# Altium PCB 不带继电器产品.PcbDoc
Units mil, origin at the board's own origin, x right, y up, seen from the top; angles counter-clockwise.
Board outline 2550 x 2362.2 mil, 2 copper layers (Top Layer, Bottom Layer); 139 components, 180 nets, 548 pads, 105 vias.
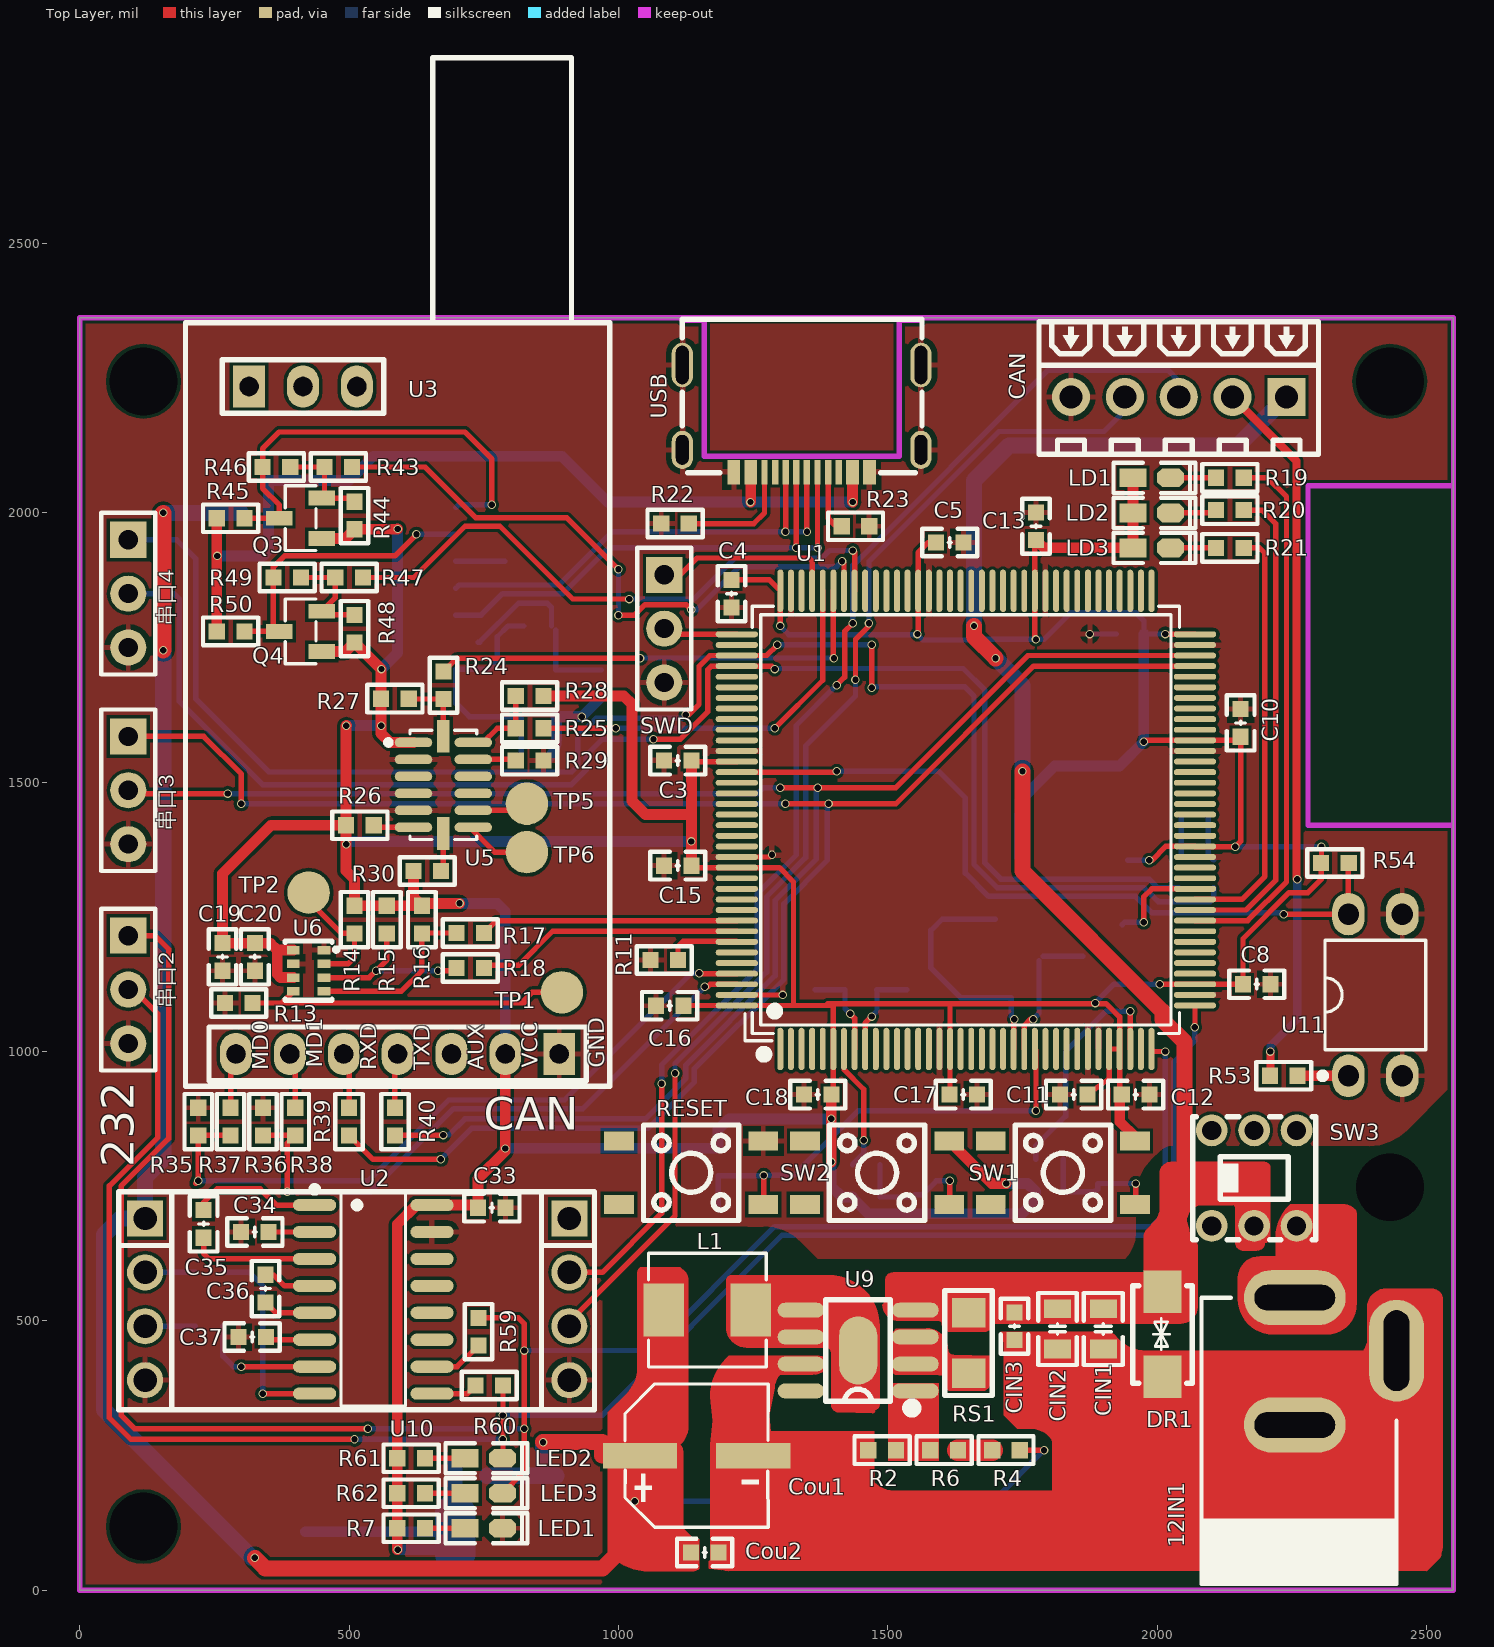
[diagram p0: Top Layer view]
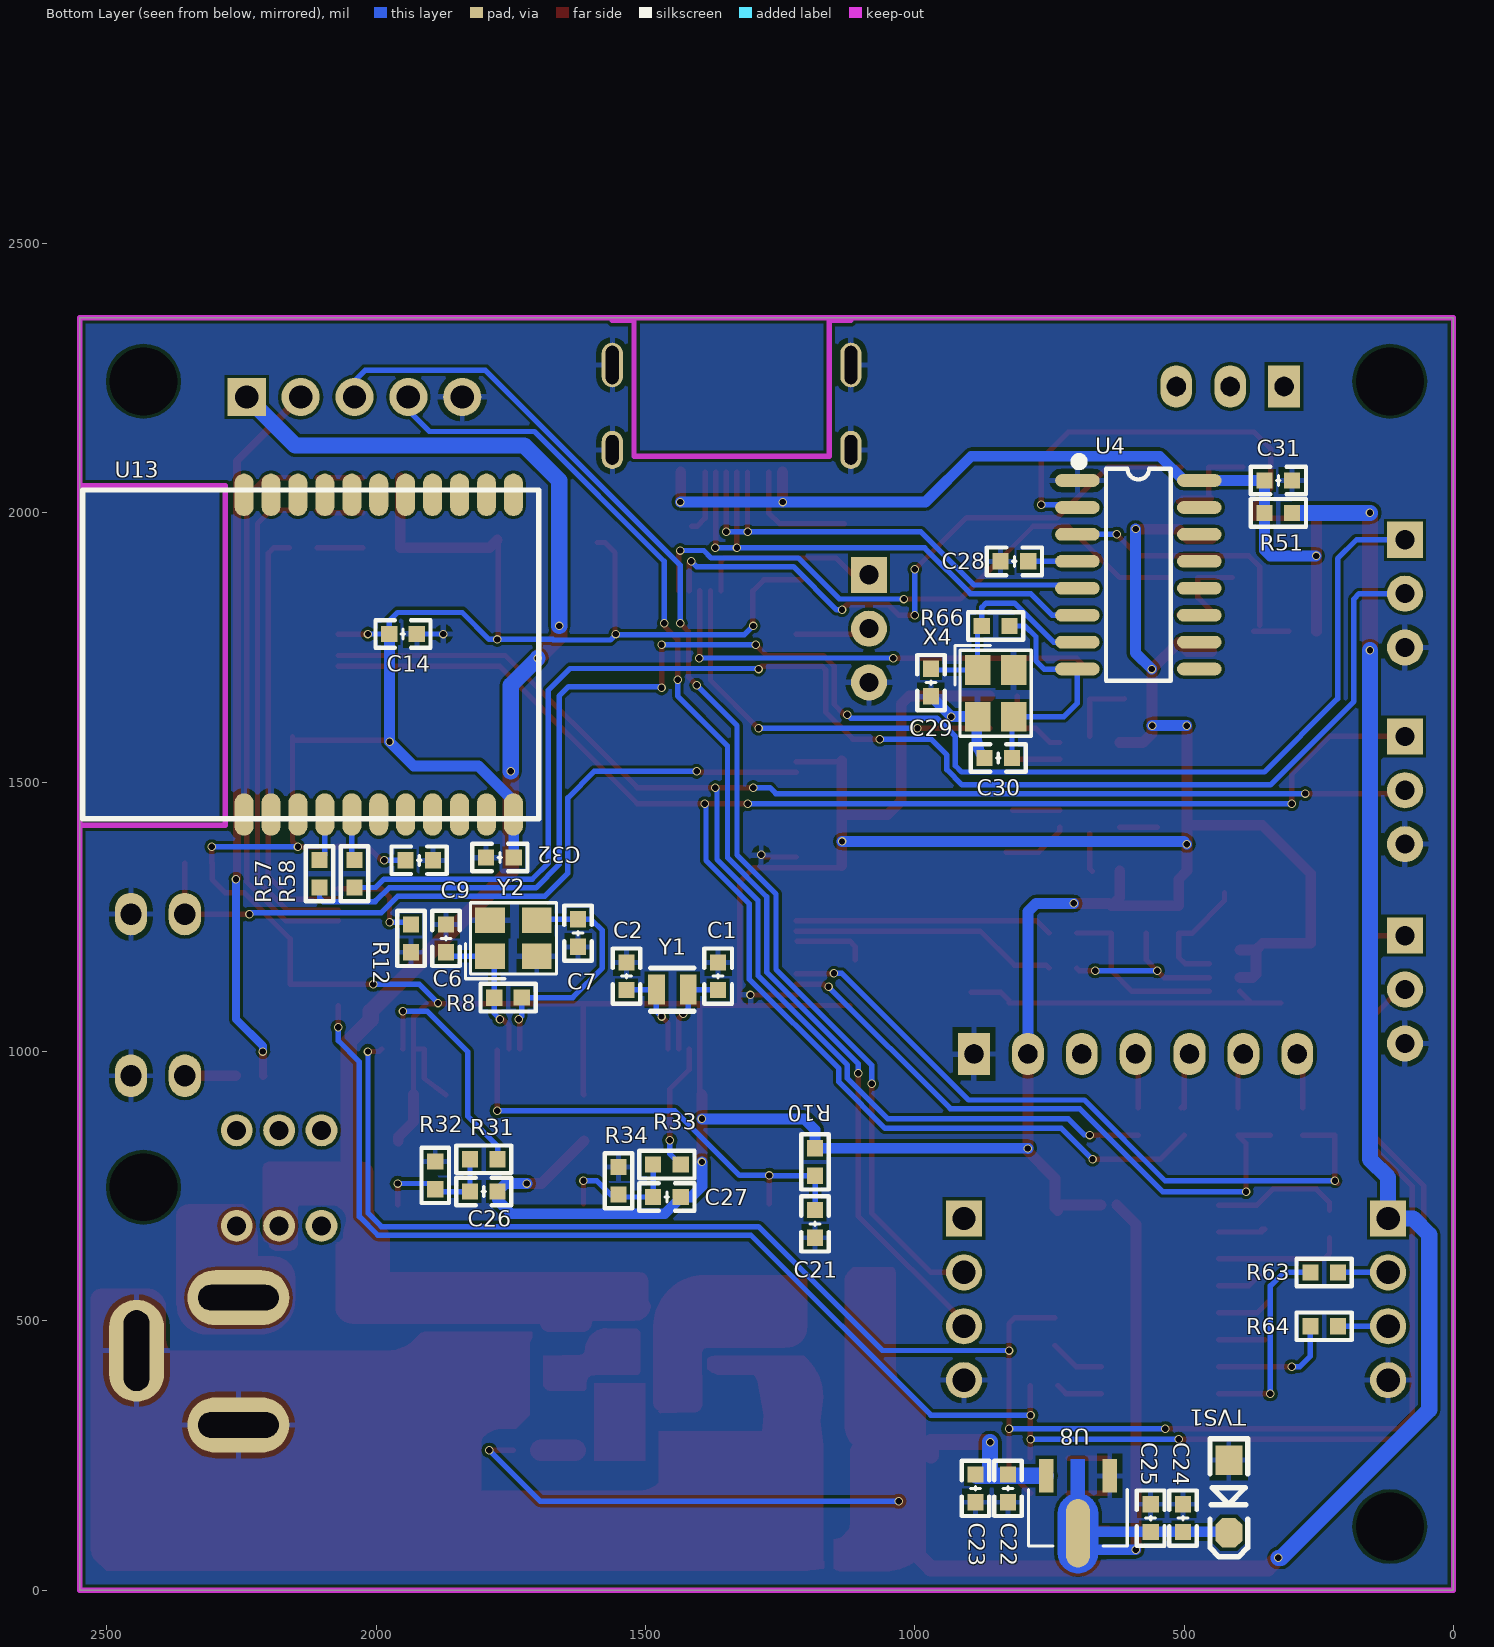
[diagram p1: Bottom Layer view, seen from below]

## Layer stack, top to bottom
Top Solder: solder mask 0.4, Solder Resist, Dk 3.5
Top Layer: signal copper 1.4
Dielectric 1: dielectric 12.6, FR-4, Dk 4.8
Bottom Layer: signal copper 1.4
Bottom Solder: solder mask 0.4, Solder Resist, Dk 3.5

## Board outline
0,0 2550,0 2550,2362.2 0,2362.2

## Design rules (kind name [scope] priority, off if disabled: settings)
Clearance [All] p1: gap=6
ComponentClearance [All] p1: gap=0 collisioncheckmode=3 verticalgap=0 showdistances=FALSE
PolygonConnect [All] p1: connectstyle=Relief reliefconductorwidth=10 reliefentries=4 polygonreliefangle="90 Angle" airgapwidth=10
RoutingVias [All] p1: holewidth=11.81 width=15.75 viastyle="Through Hole" minholewidth=11.81 minwidth=15.75 maxholewidth=11.81 maxwidth=15.75
SilkToSolderMaskClearance [IsPad] p1: minsilkscreentomaskgap=0 clearancetoexposedcopper=TRUE
SolderMaskExpansion [All] p1: expansion=4
Width [All] p1: maxlimit=40 minlimit=10 preferedwidth=10
27 further rules are at their usual default settings.

## Components (designator, comment, footprint, x,y, rotation, side; value= is the part's Value field where it differs from the comment)
12IN1 "HDR-1X3" DC-005 2350,425 r90 top
C1 "10P" C0603_L 1365,1140 r270 bottom
C2 "10P" C0603_L 1535,1140 r270 bottom
C3 "104" C0603_L 1110,1540 r0 top
C4 "10uF" C0603_L 1210,1850 r90 top
C5 "104" C0603_L 1615,1945 r180 top
C6 "22P" C0603_L 1870,1210 r270 bottom
C7 "22P" C0603_L 1625,1220 r90 bottom
C8 "104" C0603_L 2185,1125 r0 top
C9 "104" C0603_L 1920,1355 r180 bottom
C10 "104" C0603_L 2155,1610 r90 top
C11 "104" C0603_L 1845,920 r180 top
C12 "104" C0603_L 1960,920 r0 top
C13 "104" C0603_L 1775,1975 r90 top
C14 "104" C0603_L 1950,1775 r180 bottom
C15 "104" C0603_L 1110,1345 r180 top
C16 "104" C0603_L 1095,1085 r180 top
C17 "104" C0603_L 1640,920 r0 top
C18 "104" C0603_L 1370,920 r180 top
C19 "104" C0603_L 265,1175.59 r90 top
C20 "105" C0603_L 325,1175.59 r90 top
C21 "104" C0603_L 1185,680 r90 bottom
C22 "1uf" C0603_L 827.01,189.01 r90 bottom
C23 "104" C0603_L 887.01,189.01 r90 bottom
C24 "1uf" C0603_L 502.01,134.01 r270 bottom
C25 "104" C0603_L 562.01,134.01 r270 bottom
C26 "104" C0603_L 1800,740 r0 bottom
C27 "104" C0603_L 1460,730 r0 bottom
C28 "104" C0603_L 815,1910 r180 bottom
C29 "22p" C0603_L 970,1685 r90 bottom
C30 "22p" C0603_L 845,1545 r180 bottom
C31 "104" C0603_L 325,2060 r0 bottom
C32 "104" C0603_L 1770,1360 r0 bottom
C33 "0.22uf" C0603_L 765,710 r0 top
C34 "105" C0603_L 325,665 r0 top
C35 "0.22uf" C0603_L 230,680 r270 top
C36 "105" C0603_L 345,560 r270 top
C37 "105" C0603_L 320,470 r180 top
CAN "HDR-1X5" 5PCAN接口 2040,2215 r180 top
CIN1 "47uF/50VD6" C0805_L 1900,485 r270 top
CIN2 "47uF/50VD6" C0805_L 1815,485 r270 top
CIN3 "104" C0603_L 1735,490 r90 top
Cou1 "470uF/D6.3 L7.7/C2977552" D6.3/470uf 1145,250 r0 top
Cou2 "104" C0603_L 1160,70 r180 top
DR1 "SMAJ26CA/C7466479" TVS 2010,475 r270 top
L1 "68uH" 0530 1165,520 r0 top
LD1 "红色" LED0603_Y 1990,2065 r0 top
LD2 "红色" LED0603_Y 1990,2000 r0 top
LD3 "红色" LED0603_Y 1990,1935 r0 top
LED1 "红色" LED0603_Y 750,115 r0 top
LED2 "红色" LED0603_Y 750,245 r0 top
LED3 "红色" LED0603_Y 750,180 r0 top
Q3 "2N7002_C916396" 2N7002 410,1990 r0 top
Q4 "2N7002_C916396" 2N7002 410,1780 r0 top
R2 "10K" R0603_L 1489.41,260 r0 top
R4 "90K" R0603_L 1719.41,260 r0 top
R6 "90K" R0603_L 1604.41,260 r0 top
R7 "10K" R0603_L 615,115 r180 top
R8 "1M" R0603_L 1755,1100 r180 bottom
R10 "10K" R0603_L 1185,795 r90 bottom
R11 "10K" R0603_L 1085,1170 r0 top
R12 "10K" R0603_L 1935,1210 r90 bottom
R13 "10K" R0603_L 295,1090 r0 top
R14 "10K" R0603_L 510,1245 r90 top
R15 "10K" R0603_L 570,1245 r90 top
R16 "10K" R0603_L 635,1245 r90 top
R17 "0R" R0603_L 725,1220 r180 top
R18 "0R" R0603_L 725,1155 r180 top
R19 "4.7K" R0603_L 2135,2065 r180 top
R20 "4.7K" R0603_L 2135,2005 r180 top
R21 "4.7K" R0603_L 2135,1935 r180 top
R22 "5.1K" R0603_L 1105,1980 r0 top
R23 "5.1K" R0603_L 1440,1975 r0 top
R24 "0R" R0603_L 675,1680 r270 top
R25 "0R" R0603_L 835,1600 r180 top
R26 "0R" R0603_L 520,1420 r180 top
R27 "10K" R0603_L 585,1655 r180 top
R28 "10K" R0603_L 835,1660 r0 top
R29 "0R" R0603_L 835,1540 r180 top
R30 "10K" R0603_L 645,1335 r180 top
R31 "1K" R0603_L 1800,800 r0 bottom
R32 "4.7K" R0603_L 1890,770 r270 bottom
R33 "1K" R0603_L 1460,790 r0 bottom
R34 "4.7K" R0603_L 1550,760 r270 bottom
R35 "10K" R0603_L 220,870 r90 top
R36 "10K" R0603_L 340,870 r90 top
R37 "0R" R0603_L 280,870 r90 top
R38 "0R" R0603_L 400,870 r90 top
R39 "0R" R0603_L 500,870 r90 top
R40 "0R" R0603_L 585,870 r90 top
R43 "0R" R0603_L 480,2085 r0 top
R44 "4.7k" R0603_L 510,1995 r270 top
R45 "4.7k" R0603_L 280,1990 r180 top
R46 "NC" R0603_L 365,2085 r0 top
R47 "0R" R0603_L 500,1880 r0 top
R48 "4.7k" R0603_L 510,1785 r270 top
R49 "NC" R0603_L 385,1880 r0 top
R50 "4.7k" R0603_L 280,1780 r180 top
R51 "NC/OR" R0603_L 325,2000 r180 bottom
R53 "1K" R0603_L 2235,955 r0 top
R54 "10K" R0603_L 2330,1350 r0 top
R57 "0R" R0603_L 2105,1330 r90 bottom
R58 "0R" R0603_L 2040,1330 r90 bottom
R59 "0R" R0603_L 740,480 r270 top
R60 "0R" R0603_L 760,380 r180 top
R61 "4.7K" R0603_L 615,245 r0 top
R62 "4.7K" R0603_L 615,180 r0 top
R63 "0R" R0603_L 240,590 r180 bottom
R64 "0R" R0603_L 240,490 r180 bottom
R66 "NC/1M" R0603_L 850,1790 r180 bottom
RESET "C963229" 按键4.5*4.5 1135,775 r180 top
RS1 "0.051R 2512" R1206_L 1650,460 r270 top
SW1 "C963229" 按键4.5*4.5 1825,775 r180 top
SW2 "C963229" 按键4.5*4.5 1480,775 r180 top
SW3 "PS-5850A-6PL/C963201" 电源开关 2180,765 r0 top
SWD "HDR-1X3" HDR2.54-LI-3P 1085,1785 r270 top
TP1 "SDO" 测试点 895,1110 r0 top
TP2 "CSB" 测试点 425,1295 r0 top
TP5 "IRQ" 测试点 830,1460 r0 top
TP6 "IRQ" 测试点 830,1370 r0 top
TVS1 "3.3V" SOD-123 417.01,174.01 r270 bottom
U1 "STM32F103ZET6" STME32F103ZET6 1645,1430 r0 top
U2 "SP3232EEN" max232 545,540 r270 top
U3 "无线通讯模块泽耀AS32-ttl-100-c" YAOZE 590,1615 r90 top locked
U4 "CH340G" SOP16_M 585,1885 r180 bottom
U5 "ADXL345BCCZ" ADXL345 675,1495 r0 top
U6 "BMP280" BMP280 425,1150 r0 top
U8 "AMS1117-3.3V" 1117-3.3 697.01,159.01 r90 bottom
U9 "Component_1" H4025/9脚 1445,445 r180 top
U10 "232转CAN" CAN模块 515,540 r0 top
U11 "EL817" EL817/C160821 2405,1105 r90 top
U13 "MK8000TR7" "MK8000 PCB_V1.0封装" 1745,1440 r90 bottom
USB "HC-TYPE-C-16P-C19274020" TYPEC 1340,2175 r180 top
X4 "12MHz/C9002/SMD3225" SMD3225 850,1665 r270 bottom
Y1 "32.768K/ C403709/SMD2012/2P" 32.768K 1450,1115 r0 bottom
Y2 "8MHz/C2682774/SMD3225" SMD3225 1745,1210 r180 bottom
串口2 "HDR-1X3" HDR2.54-LI-3P 90,1115 r270 top
串口3 "HDR-1X3" HDR2.54-LI-3P 90,1485 r270 top
串口4 "HDR-1X3" HDR2.54-LI-3P 90,1850 r270 top

## Footprints (in the part's own frame and the unit in brackets; to place one, negate y for a bottom-side part, rotate by r counter-clockwise, add the part's x,y. Pads: shape width x height; smd on the part's side, far side on the other; paste and mask are expansions set on the pad)
2N7002 [mm]
  rect 1.25x0.7 smd: 1(1,-0.95) 2(1,0.95) 3(-1,0)
  silkscreen extent -0.73,-1.53 0.73,1.53
5PCAN接口 [mm]
  rect 1.8x1.8 hole 1.1 paste+0 mask+0.05: 1(-5.08,0)
  round 1.8 hole 1.1 paste+0 mask+0.05: 2(-2.54,0) 3(0,0) 4(2.54,0) 5(5.08,0)
  silkscreen extent -6.59,-3.56 6.59,2.7
32.768K [mm]
  rect 0.8x1.4 smd: 1(-0.75,0) 2(0.75,0)
  silkscreen extent -1.02,-1.02 1.02,1.02
0530 [mm]
  rect 1.9x2.5 smd mask+0.051: 1(2.05,0) 2(-2.05,0)
  silkscreen extent -2.78,-2.68 2.78,2.68
1117-3.3 [mm]
  rect 1.575x0.672 smd: 1(1.356,-1.5) 3(1.356,1.5)
  oval 3.226x1.14 smd: 2(-1.356,0)
  Top Layer region: -2.283,0.95 -0.429,0.95 -0.384,0.949 -0.34,0.946 -0.296,0.94 -0.252,0.933 -0.208,0.924 -0.165,0.912 -0.123,0.899 -0.081,0.884 -0.04,0.866 0,0.847 0.04,0.826 0.078,0.803 0.115,0.779 0.151,0.752 0.185,0.724 0.219,0.695 0.251,0.664 0.281,0.631 0.31,0.597 0.337,0.562 0.362,0.525 0.386,0.488 0.408,0.449 0.428,0.409 0.447,0.33 2.144,0.33 2.144,-0.33 0.447,-0.33 0.428,-0.409 0.408,-0.449 0.386,-0.488 0.362,-0.526 0.337,-0.562 0.31,-0.597 0.281,-0.631 0.251,-0.664 0.219,-0.695 0.185,-0.725 0.151,-0.753 0.115,-0.779 0.078,-0.804 0.04,-0.827 0,-0.848 -0.04,-0.867 -0.081,-0.884 -0.123,-0.899 -0.165,-0.913 -0.208,-0.924 -0.252,-0.934 -0.296,-0.941 -0.34,-0.946 -0.384,-0.949 -0.429,-0.95 -2.283,-0.95 -2.328,-0.949 -2.372,-0.946 -2.416,-0.941 -2.46,-0.934 -2.504,-0.924 -2.547,-0.913 -2.589,-0.899 -2.631,-0.884 -2.672,-0.867 -2.713,-0.848 -2.752,-0.827 -2.79,-0.804 -2.827,-0.779 -2.863,-0.753 -2.898,-0.725 -2.931,-0.695 -2.963,-0.664 -2.993,-0.631 -3.022,-0.597 -3.049,-0.562 -3.075,-0.526 -3.098,-0.488 -3.12,-0.449 -3.141,-0.409 -3.159,-0.369 -3.175,-0.327 -3.189,-0.285 -3.202,-0.242 -3.212,-0.199 -3.22,-0.155 -3.227,-0.111 -3.231,-0.067 -3.233,-0.022 -3.233,0.022 -3.231,0.067 -3.227,0.111 -3.22,0.155 -3.212,0.199 -3.202,0.242 -3.189,0.285 -3.175,0.327 -3.159,0.369 -3.141,0.409 -3.12,0.449 -3.098,0.488 -3.075,0.525 -3.049,0.562 -3.022,0.597 -2.993,0.631 -2.963,0.664 -2.931,0.695 -2.898,0.724 -2.863,0.752 -2.827,0.779 -2.79,0.803 -2.752,0.826 -2.713,0.847 -2.672,0.866 -2.631,0.884 -2.589,0.899 -2.547,0.912 -2.504,0.924 -2.46,0.933 -2.416,0.94 -2.372,0.946 -2.328,0.949
  silkscreen extent -1.95,-2.33 0.7,2.33
ADXL345 [mm]
  oval 1.769x0.448 smd: 1(-1.409,2) 2(-1.409,1.2) 3(-1.409,0.4) 4(-1.409,-0.4) 5(-1.409,-1.2) 6(-1.409,-2) 8(1.409,-2) 9(1.409,-1.2) 10(1.409,-0.4) 11(1.409,0.4) 12(1.409,1.2) 13(1.409,2)
  rect 0.6x1.545 smd: 7(0,-2.297) 14(0,2.297)
  silkscreen extent -2.72,-2.58 1.58,2.58
BMP280 [mm]
  rect 0.6x0.4 smd: 1(0.725,0.975) 2(0.725,0.325) 3(0.725,-0.325) 4(0.725,-0.975) 5(-0.725,-0.975) 6(-0.725,-0.325) 7(-0.725,0.325) 8(-0.725,0.975)
  silkscreen extent -1.1,-1.4 1.4,1.4
C0603_L [mil] "无极性贴片电容"
  rect 30x30 smd: 1(-25.59,0) 2(25.59,0)
  silkscreen extent -51,-26 51,26, body extent -31,-16 31,16, height 32
C0805_L [mil] "无极性贴片电容"
  rect 35x50 smd: 1(-37.4,0) 2(37.4,0)
  silkscreen extent -67,-36 67,36, body extent -39,-24 39,24, height 20
CAN模块 [mm]
  rect 1.7x1.7 hole 1.1: 1(-10,3.81) 8(10,3.81)
  round 1.7 hole 1.1: 2(-10,1.27) 3(-10,-1.27) 4(-10,-3.81) 5(10,-3.81) 6(10,-1.27) 7(10,1.27)
  silkscreen extent -11.25,-5.21 11.19,5.08
D6.3/470uf [mm]
  rect 3.5x1.2 smd: 1(-2.67,0) 2(2.67,0)
  silkscreen extent -3.38,-3.38 3.38,3.38
DC-005 [mm] "J DC-005电源插座 封装规格:14.2X8.8mm"
  oval 2.6x4.8 hole 1.2 slot 3.8 at 90 deg: 1(3,2.4) 2(-3,2.4)
  oval 4.8x2.6 hole 1.2 slot 3.8 at 0 deg: 3(0.5,-2.4)
  silkscreen extent -10.5,-2.4 3,6.8, body extent -10.5,-2.4 3.55,6.9, height 11.2
EL817/C160821 [mm]
  oval 2x1.524 hole 1: 1(-3.81,1.27) 2(-3.81,-1.27) 3(3.81,-1.27) 4(3.81,1.27)
  silkscreen extent -3.96,-2.38 2.58,2.63
H4025/9脚 [mm]
  oval 2.2x0.7 smd: 1(-2.7,1.905) 2(-2.7,0.635) 3(-2.7,-0.635) 4(-2.7,-1.905) 5(2.7,-1.905) 6(2.7,-0.635) 7(2.7,0.635) 8(2.7,1.905)
  oval 1.8x3.2 smd: 9(0,0)
  silkscreen extent -2.73,-2.4 1.54,2.91, body extent -3.1,-2.5 3.1,2.5, height 1.75
HDR2.54-LI-3P [mm] "排针，3脚"
  rect 1.7x1.7 hole 0.9: 1(-2.54,0)
  round 1.7 hole 0.9: 2(0,0) 3(2.54,0)
  silkscreen extent -3.81,-1.27 3.81,1.27, body extent -3.81,-1.27 3.81,1.27, height 8.5
LED0603_Y [mil] "黄色0603LED                              淘宝ID:黄晶宝石"
  rect 50x35 smd: 1(-35,0)
  oct 50x35 smd: 2(35,0)
  silkscreen extent -71,-28 81,28, body extent -32,-16 31,16, height 18
max232 [mil]
  oval 22.6x80.24 smd: 1(-175,-109.02) 2(-125,-109.02) 3(-75,-109.02) 4(-25,-109.02) 5(25,-109.02) 6(75,-109.02) 7(125,-109.02) 8(175,-109.02) 9(175,109.02) 10(125,109.02) 11(75,109.02) 12(25,109.02) 13(-25,109.02) 14(-75,109.02) 15(-125,109.02) 16(-175,109.02)
  silkscreen extent -210,-115 198,60
"MK8000 PCB_V1.0封装" [mm]
  oval 2x0.9 smd: 1(0,12.7) 2(0,11.43) 3(0,10.16) 4(0,8.89) 5(0,7.62) 6(0,6.35) 7(0,5.08) 8(0,3.81) 9(0,2.54) 10(0,1.27) 11(0,0) 12(15.075,0) 13(15.075,1.27) 14(15.075,2.54) 15(15.075,3.81) 16(15.075,5.08) 17(15.075,6.35) 18(15.075,7.62) 19(15.075,8.89) 20(15.075,10.16) 21(15.075,11.43) 22(15.075,12.7)
  silkscreen extent -0.2,-1.2 15.3,20.3
R0603_L [mil] "1/10W贴片电阻                 淘宝ID:黄晶宝石"
  rect 30x30 smd: 1(-25.59,0) 2(25.59,0)
  silkscreen extent -51,-26 51,26, body extent -31,-16 31,16, height 16
R1206_L [mil] "1/4W贴片电阻"
  rect 55x62 smd: 1(-55.12,0) 2(57.09,0)
  silkscreen extent -96,-44 98,44, body extent -63,-31 63,32, height 22
SMD3225 [mm]
  rect 1.4x1.2 smd: 1(-1.1,-0.85) 2(1.1,-0.85) 3(1.1,0.85) 4(-1.1,0.85)
  silkscreen extent -2.26,-1.91 2.03,1.68
SOD-123 [mil] "2.7x1.6X1.1mm（长宽高，不包括引脚） 淘宝ID:黄晶宝石"
  rect 55x50 smd: 1(-67.5,0)
  oct 55x50 smd: 2(67.5,0)
  silkscreen extent -108,-35 112,35, body extent -73,-31 73,31, height 48
SOP16_M [mm] "10.3*6.2*1.8mm（长宽高）封装库来自淘宝卖家 ID：黄晶宝石"
  oval 2.1x0.6 smd: 1(-2.875,4.445) 2(-2.875,3.175) 3(-2.875,1.905) 4(-2.875,0.635) 5(-2.875,-0.635) 6(-2.875,-1.905) 7(-2.875,-3.175) 8(-2.875,-4.445) 9(2.875,-4.445) 10(2.875,-3.175) 11(2.875,-1.905) 12(2.875,-0.635) 13(2.875,0.635) 14(2.875,1.905) 15(2.875,3.175) 16(2.875,4.445)
  silkscreen extent -2.95,-5 1.52,5.49, body extent -3,-5 3,5, height 1.9
STME32F103ZET6 [mm]
  oval 0.28x2 smd: 1(-8.75,-10.8) 2(-8.25,-10.8) 3(-7.75,-10.8) 4(-7.25,-10.8) 5(-6.75,-10.8) 6(-6.25,-10.8) 7(-5.75,-10.8) 8(-5.25,-10.8) 9(-4.75,-10.8) 10(-4.25,-10.8) 11(-3.75,-10.8) 12(-3.25,-10.8) 13(-2.75,-10.8) 14(-2.25,-10.8) 15(-1.75,-10.8) 16(-1.25,-10.8) 17(-0.75,-10.8) 18(-0.25,-10.8) 19(0.25,-10.8) 20(0.75,-10.8) 21(1.25,-10.8) 22(1.75,-10.8) 23(2.25,-10.8) 24(2.75,-10.8) 25(3.25,-10.8) 26(3.75,-10.8) 27(4.25,-10.8) 28(4.75,-10.8) 29(5.25,-10.8) 30(5.75,-10.8) 31(6.25,-10.8) 32(6.75,-10.8) 33(7.25,-10.8) 34(7.75,-10.8) 35(8.25,-10.8) 36(8.75,-10.8) 73(8.75,10.8) 74(8.25,10.8) 75(7.75,10.8) 76(7.25,10.8) 77(6.75,10.8) 78(6.25,10.8) 79(5.75,10.8) 80(5.25,10.8) 81(4.75,10.8) 82(4.25,10.8) 83(3.75,10.8) 84(3.25,10.8) 85(2.75,10.8) 86(2.25,10.8) 87(1.75,10.8) 88(1.25,10.8) 89(0.75,10.8) 90(0.25,10.8) 91(-0.25,10.8) 92(-0.75,10.8) 93(-1.25,10.8) 94(-1.75,10.8) 95(-2.25,10.8) 96(-2.75,10.8) 97(-3.25,10.8) 98(-3.75,10.8) 99(-4.25,10.8) 100(-4.75,10.8) 101(-5.25,10.8) 102(-5.75,10.8) 103(-6.25,10.8) 104(-6.75,10.8) 105(-7.25,10.8) 106(-7.75,10.8) 107(-8.25,10.8) 108(-8.75,10.8)
  oval 2x0.28 smd: 37(10.8,-8.75) 38(10.8,-8.25) 39(10.8,-7.75) 40(10.8,-7.25) 41(10.8,-6.75) 42(10.8,-6.25) 43(10.8,-5.75) 44(10.8,-5.25) 45(10.8,-4.75) 46(10.8,-4.25) 47(10.8,-3.75) 48(10.8,-3.25) 49(10.8,-2.75) 50(10.8,-2.25) 51(10.8,-1.75) 52(10.8,-1.25) 53(10.8,-0.75) 54(10.8,-0.25) 55(10.8,0.25) 56(10.8,0.75) 57(10.8,1.25) 58(10.8,1.75) 59(10.8,2.25) 60(10.8,2.75) 61(10.8,3.25) 62(10.8,3.75) 63(10.8,4.25) 64(10.8,4.75) 65(10.8,5.25) 66(10.8,5.75) 67(10.8,6.25) 68(10.8,6.75) 69(10.8,7.25) 70(10.8,7.75) 71(10.8,8.25) 72(10.8,8.75) 109(-10.8,8.75) 110(-10.8,8.25) 111(-10.8,7.75) 112(-10.8,7.25) 113(-10.8,6.75) 114(-10.8,6.25) 115(-10.8,5.75) 116(-10.8,5.25) 117(-10.8,4.75) 118(-10.8,4.25) 119(-10.8,3.75) 120(-10.8,3.25) 121(-10.8,2.75) 122(-10.8,2.25) 123(-10.8,1.75) 124(-10.8,1.25) 125(-10.8,0.75) 126(-10.8,0.25) 127(-10.8,-0.25) 128(-10.8,-0.75) 129(-10.8,-1.25) 130(-10.8,-1.75) 131(-10.8,-2.25) 132(-10.8,-2.75) 133(-10.8,-3.25) 134(-10.8,-3.75) 135(-10.8,-4.25) 136(-10.8,-4.75) 137(-10.8,-5.25) 138(-10.8,-5.75) 139(-10.8,-6.25) 140(-10.8,-6.75) 141(-10.8,-7.25) 142(-10.8,-7.75) 143(-10.8,-8.25) 144(-10.8,-8.75)
  silkscreen extent -10.41,-11.25 10.08,10.08
TVS [mm]
  rect 2x1.8 smd: 1(-2,0) 2(2,0)
  silkscreen extent -2.3,-1.4 2.3,1.4
TYPEC [mm]
  oval 1x1.8 hole 0.6 slot 1.4 at 90 deg: 12(-5.625,1.475)
  oval 1x1.8 hole 0.6 slot 1.4 at 90 deg copper offset 0,0: 13(5.625,1.475)
  oval 1x2.1 hole 0.6 slot 1.8 at 90 deg: 14(-5.625,-2.525)
  oval 1x2.1 hole 0.6 slot 1.8 at 90 deg copper offset 0,0: 15(5.625,-2.525)
  rect 0.6x1.15 smd paste+0 mask+0.05: A1B12(-3.2,2.525) A4B9(-2.4,2.525) A9B4(2.4,2.525) A12B1(3.2,2.525)
  rect 0.3x1.15 smd paste+0 mask+0.05: A5(-1.25,2.525) A6(-0.25,2.525) A7(0.25,2.525) A8(1.25,2.525) B5(1.75,2.525) B6(0.75,2.525) B7(-0.75,2.525) B8(-1.75,2.525)
  Keep-Out Layer lines w0.254: 4.6,-1.397 4.6,1.778 4.6,-1.397 ; 4.6,-1.397 4.6,-4.625 ; 4.6,-1.397 4.6,-4.625 ; 4.6,-4.625 5.625,-4.625 4.6,-4.625 ; -4.6,1.778 -4.6,-1.494 -4.6,1.778 ; -4.6,1.778 4.572,1.778 -4.6,1.778 ; -4.6,-4.625 -4.6,-1.397 -4.6,-4.625 ; -4.6,-4.625 -5.625,-4.625 -4.6,-4.625
  silkscreen extent -5.68,-4.68 5.62,2.55
YAOZE [mm]
  rect 2x1.5 hole 0.9 slot 0.905 at 0 deg: 1(-15.736,-7.62) 10(15.736,7)
  oval 2x1.5 hole 0.9 slot 0.905 at 0 deg: 2(-15.736,-5.08) 3(-15.736,-2.54) 4(-15.736,0) 5(-15.736,2.54) 6(-15.736,5.08) 7(-15.736,7.62) 8(15.736,1.92) 9(15.736,4.46)
  silkscreen extent -17.26,-10 31.24,10
按键4.5*4.5 [mm]
  rect 1.4x0.9 smd: 1(-3.4,1.5) 2(3.4,1.5) 3(-3.4,-1.5) 4(3.4,-1.5)
  silkscreen extent -2.25,-2.25 2.25,2.25
测试点 [mm]
  round 2 smd: 1(0,0)
电源开关 [mm]
  round 1.5 hole 0.9 paste+0 mask+0.05: 1(-2,-2.25) 2(0,-2.25) 3(2,-2.25) 4(-2,2.25) 5(0,2.25) 6(2,2.25)
  silkscreen extent -2.9,-2.9 2.9,2.9

## Part data
12IN1 SWD 串口2 串口3 串口4: library part "Header 3", "3P接插件"
C1 C2 C3 C4 C5 C6 C7 C8 C9 C10 C11 C12 C13 C14 C15 C16 C17 C18 C19 C20 C21: library part C
C22 C23 C24 C25 C26 C27 C28 C29 C30 C31 C32: library part C, "无极性贴片电容"
C33 C34 C35 C36 C37: library part CAP, "Capacitor"
CAN: library part "Header 5", "5P接插件"
CIN1 CIN2 Cou1: library part CE, "直插电解电容"
CIN3 Cou2: library part C, "贴片电容"
DR1: library part DR, "瞬态电压抑制二极管"
L1: library part L, "小功率贴片电感"
LD1 LD2 LD3 LED1 LED2 LED3: library part LED-SMD, "贴片LED"
R2 R4 R6 R7 R19 R20 R21 R22 R23 R31 R32 R33 R34 R43 R44 R45 R46 R47 R48 R49 R50 R51 R63 R64 R66 RS1: library part R, "贴片电阻"
R8 R10 R11 R12 R13 R14 R15 R16 R17 R18 R53 R54 R59 R60 R61 R62: library part R
R24 R25 R26 R27 R28 R29 R30 R35 R36 R37 R38 R39 R40 R57 R58: library part RES2
RESET SW1 SW2: library part KH-6X6X15H-TJ-FS
SW3: library part PS-5850A-6PL
TP1 TP2 TP5 TP6: library part "TEST TP", "测试环"
TVS1: library part 1N4102, "8.7V/0.5W稳压管"
U3 U10: library part Component_1
U4: "串口转USB"
U8: library part AMS1117, "三端稳压芯片"
U11: library part EL817(C)-G
USB: library part HC-TYPE-C-16P-C08B
X4 Y2: library part X32258MSB4SI
Y1: library part XTAL_1, "Crystal Oscillator"

## Free pads (board coordinates)
  round 60 hole 125.98: 0(118.11,118.11) 0(118.11,2244.09) 0(2431.89,748.03) 0(2431.89,2244.09)

## Via types
v1: diameter 15.75, hole 11.81, Top Layer to Bottom Layer, 105 vias

## Nets (pads, with @x,y where several pads share a name; then routed paths per layer and width w, separated by ;. In a path a pad name is that pad's centre, name@x,y a point inside that pad or via, vN(x,y) a via of type N, cw(c..) or ccw(c..) an arc to the next point about the centre after c; other vN are vias at no path point)
5V: C22.2 C23.2 Cou1.1 Cou2.2 L1.2 R4.2 R51.2 U8.3 U10.1 | length 4179.4
  Top Layer w10: R4.2 v1(1790,260)
  Top Layer w30: v1(155,1745) v1(155,2000) ; v1(325,60) 344.42,40.58 970.58,40.58 1030,100 ; v1(860,275) 970,275 970,250
  Bottom Layer w10: v1(1030,165) 1695,165 v1(1790,260)
  Bottom Layer w30: v1(155,1745) 155,800 121.3,766.3 U10.1 75,690 45,660 45,335 320,60 v1(325,60) ; v1(155,2000) R51.2 ; U8.3 C23.2@884.82,212.4 ; 860,217.4 v1(860,275)
BOOT0: R11.2 U1.138 | length 137
  Top Layer w10: R11.2 1110.59,1195 1120.59,1205 U1.138@1218.42,1205
BOOT1: R12.2 U1.48 | length 190.3
  Top Layer w10: v1(1975,1240) 1975,1287.05 1990,1302.05 U1.48
  Bottom Layer w10: R12.2 1939.41,1240 v1(1975,1240)
CANH: CAN.3 U10.7 | length 2359.9
  Top Layer w10: U10.7 970,590 1080,700 v1(1080,940) ; v1(1405,1680) 1420,1695 1420,1780 v1(1435,1795)
  Bottom Layer w10: v1(1080,940) 1080,975 1257.5,1152.5 1257.5,1292.5 1330,1365 1330,1605 v1(1405,1680) ; v1(1435,1795) 1435,1902.63 1797.37,2265 2020,2265 2040,2245 CAN.3
CANL: CAN.4 U10.6 | length 2266.4
  Top Layer w10: U10.6 908.7,498.7 1105,695 v1(1105,960) ; v1(1440,1690) 1440,1765 1465,1790 v1(1465,1795)
  Bottom Layer w10: v1(1105,960) 1105,977.37 1275,1147.37 1275,1287.37 1347.5,1359.87 1347.5,1567.5 1440,1660 v1(1440,1690) ; v1(1465,1795) 1465,1910 1706,2151 1901,2151 1940,2190 CAN.4
CSB: R14.1 TP2.1 U6.2 | length 231
  Top Layer w10: TP2.1 425,1280 485.59,1219.41 R14.1 510,1175 497.79,1162.79 U6.2
D+: U4.5 USB.A6 USB.B6 | length 916.7
  Top Layer w10: v1(1310,1965) 1310.47,1965.47 USB.B6 ; USB.A6 1349.84,1965.16 v1(1350,1965)
  Bottom Layer w10: U4.5 704.19,1866 890,1866 989,1965 v1(1310,1965) v1(1350,1965)
D-: U4.6 USB.A7 USB.B7 | length 1005
  Top Layer w10: v1(1330,1935) 1330.16,1935.16 USB.A7 ; USB.B7 1369.53,1935.47 v1(1370,1935)
  Bottom Layer w10: U4.6 745,1810 785,1850 896.63,1850 981.63,1935 v1(1330,1935) v1(1370,1935)
FIFO_RCLK: U1.134
FIFO_WEN: U1.133
GBC_KEY: U1.40
GBC_LED: U1.110
GBC_RX: R39.1 U1.69 串口3.1 | length 3508.5
  Top Layer w10: 串口3.1 230,1585 300,1515 v1(300,1460) ; R39.1 544.41,800 v1(670,800) ; v1(1310,1460) v1(1390,1460) 1515,1460 1770.43,1715.43 U1.69
  Bottom Layer w10: v1(300,1460) v1(1310,1460) ; v1(670,800) 727.5,857.5 1055.13,857.5 1141,943.37 1141,968.12 1307,1134.12 1307,1274.12 1387.5,1354.62 1387.5,1457.5 v1(1390,1460)
GBC_TX: R40.1 U1.70 串口3.2 | length 3306
  Top Layer w10: 串口3.2@96.13,1478.87 v1(275,1478.87) ; R40.1 674.41,844.41 v1(675,845) ; v1(1300,1490) v1(1370,1490) 1515,1490 1760.12,1735.12 U1.70
  Bottom Layer w10: v1(275,1478.87) 1257.87,1478.87 1269,1490 v1(1300,1490) ; v1(675,845) 685,845 715,875 1050,875 1125,950 1125,974.75 1291,1140.75 1291,1280.75 1367,1356.75 1367,1488 1369,1490 v1(1370,1490)
GND: 12IN1.2 12IN1.3 C1.1 C2.1 C3.1 C4.1 C5.1 C6.1 C7.1 C8.2 C9.2 C10.2 C11.2 C12.2 C13.2 C14.2 C15.2 C16.2 C17.2 C18.2 C19.1 C20.1 C21.1 C22.1 C23.1 C24.1 C25.1 C28.1 C29.1 C30.1 C31.1 C32.2 C33.2 C34.1 C37.2 CAN.5 CIN1.2 CIN2.2 CIN3.1 Cou1.2 Cou2.1 DR1.2 LED1.2 R2.1 R11.1 R12.1 R13.1 R22.1 R23.2 R29.1 R32.1 R34.1 R35.2 R36.2 RESET.3 SWD.3 TVS1.1 U1.16 U1.30 U1.31 U1.38 U1.51 U1.61 U1.71 U1.83 U1.94 U1.107 U1.120 U1.130 U1.143 U2.15 U3.1 U4.1 U5.2 U5.4 U5.5 U6.1 U6.7 U8.1 U9.7 U10.4 U10.5 U11.2 U11.3 U13.1 U13.2 USB.12 USB.13 USB.14 USB.15 USB.A1B12 USB.A12B1 X4.2 X4.4 Y2.2 Y2.4 串口2.3 串口3.3 串口4.3 | length 384.6
  Top Layer w10: U1.143 1220,1105 v1(1305,1105) ; U1.130 1281.1,1361.1 v1(1285,1365)
  Bottom Layer w10: v1(1875,1775) C14.2
  Bottom Layer w20: C30.1 ccw(c835.81,1579.78) 885,1579.78 885,1617.98 ccw(c879.76,1617.98) X4.2 v1(931.99,1621.69) 969.71,1659.41 C29.1
IIC_SCL: R17.1 U1.136 | length 478.7
  Top Layer w10: R17.1 773.58,1242.99 U1.136
IIC_SDA: R18.1 U1.137 | length 497.5
  Top Layer w10: R18.1 755.96,1160.37 815,1160.37 877.94,1223.31 U1.137
INT1_345: TP6.1 U5.8 | length 122.6
  Top Layer w10: U5.8 730.49,1409.51 770,1370 TP6.1
INT2_345: TP5.1 U5.9 | length 87.3
  Top Layer w10: U5.9 TP5.1@817.76,1447.76
LCD_BL: R20.1 U1.46 | length 904.7
  Top Layer w10: U1.46 2165,1262.68 2220,1317.68 2220,1980 2195,2005 R20.1
LED0: U1.135
NetC1_2: C1.2 U1.8 Y1.1 | length 172.5
  Top Layer w10: v1(1430,1070) 1438.31,1061.69 U1.8
  Bottom Layer w10: C1.2@1365.59,1115 Y1.1 1420.47,1079.53 v1(1430,1070)
NetC2_2: C2.2 U1.9 Y1.2 | length 175.2
  Top Layer w10: U1.9 1457.99,1052.99 v1(1470,1065)
  Bottom Layer w10: v1(1470,1065) 1480,1075 1480,1114.53 Y1.2 1534.42,1115 C2.2
NetC6_2: C6.2 R8.1 U1.24 Y2.1 | length 252.1
  Top Layer w10: U1.24 1753.27,1048.27 1765,1060 v1(1770,1060)
  Bottom Layer w10: v1(1770,1060) 1780.59,1070.59 R8.1 Y2.1@1780.59,1168.82 ; Y2.1 C6.2@1862.13,1176.53
NetC7_2: C7.2 R8.2 U1.23 Y2.3 | length 468.4
  Top Layer w10: U1.23 1733.58,1058.58 v1(1735,1060)
  Bottom Layer w10: Y2.3@1699.57,1245.59 C7.2 1600.59,1245.59 1580,1225 1580,1155 1635,1100 R8.2 1729.41,1065.59 v1(1735,1060)
NetC26_2: C26.2 R31.2 R32.2 SW1.1 | length 245.2
  Top Layer w10: SW1.1@1960,715.94 v1(1960,755)
  Bottom Layer w10: R31.2 C26.2 1879.36,740 ccw(c1879.36,755.06) R32.2 1890,755 v1(1960,755)
NetC27_2: C27.2 R33.2 R34.2 SW2.1 | length 238.5
  Top Layer w10: SW2.1@1615,717.09 v1(1615,760)
  Bottom Layer w10: R33.2 C27.2 R34.2@1545.59,730 ; R34.2 1564.41,734.41 1590,760 v1(1615,760)
NetC28_2: C28.2 U4.4 | length 91.2
  Bottom Layer w10: U4.4 C28.2
NetC29_2: C29.2 R66.1 U4.7 X4.1 | length 361.5
  Bottom Layer w10: 740,1760 742.37,1760 814.87,1832.5 867.5,1832.5 875.59,1824.41 R66.1 ; R66.1@883.46,1782.13 X4.1 C29.2@967.72,1708.31
NetC30_2: C30.2 R66.2 U4.8 X4.3 | length 455.5
  Bottom Layer w10: C30.2 819.41,1618.81 X4.3 723.31,1621.69 698.19,1646.81 U4.8 760,1710 775,1725 775,1770 795,1790 R66.2
NetC34_2: C34.2 U2.2 | length 85.4
  Top Layer w10: C34.2@350.59,670 C34.2@355.58,670 ; C34.2@355.58,665 U2.2
NetC35_1: C35.1 U2.1 | length 243.2
  Top Layer w10: C35.1 230,720 255,745 335,745 365,715 U2.1
NetC35_2: C35.2 U2.3 | length 239.5
  Top Layer w10: C35.2 230,625 240,615 U2.3
NetC36_1: C36.1 U2.4 | length 84.3
  Top Layer w10: 360,585 380,565 U2.4
NetC36_2: C36.2 U2.5 | length 99
  Top Layer w10: C36.2 364.41,515 U2.5
NetC37_1: C37.1 U2.6 | length 85.4
  Top Layer w10: C37.1@350.6,465 U2.6
NetL1_1: L1.1 U9.5 U9.6 U9.9
NetLD1_2: LD1.2 R19.2 | length 84.4
  Top Layer w10: LD1.2 R19.2
NetLD2_2: LD2.2 R20.2 | length 86.5
  Top Layer w10: LD2.2 2104.41,2000 R20.2
NetLD3_2: LD3.2 R21.2 | length 84.4
  Top Layer w10: LD3.2 R21.2
NetLED1_1: LED1.1 R7.1 | length 74.4
  Top Layer w10: R7.1 LED1.1
NetLED2_1: LED2.1 R61.2 | length 74.4
  Top Layer w10: R61.2 LED2.1
NetLED3_1: LED3.1 R62.2 | length 74.4
  Top Layer w10: R62.2 LED3.1
NetR2_2: R2.2 R6.1 U9.1
NetR4_1: R4.1 R6.2 | length 63.8
  Top Layer w40: R6.2 R4.1
NetR22_2: R22.2 USB.B5 | length 224.4
  Top Layer w10: R22.2 1251.1,1980 1271.11,2000 USB.B5
NetR23_1: R23.1 USB.A5 | length 117
  Top Layer w10: USB.A5 1389.22,1990 1404.22,1975 R23.1
NetR26_1: R26.1 U5.6 | length 70.2
  Top Layer w10: R26.1@549.34,1416.26 U5.6
NetR30_1: R30.1 U5.7 | length 71.4
  Top Layer w10: R30.1 675,1339.41 U5.7
NetR37_2: R37.2 U3.7 | length 104
  Top Layer w10: R37.2 280,985.48 U3.7
NetR38_2: R38.2 U3.6 | length 104
  Top Layer w10: U3.6 400,985.47 R38.2
NetR39_2: R39.2 U3.5 | length 111.1
  Top Layer w10: U3.5 500,985.47 R39.2@500,900.59 ; R39.2 R39.2@500,900.59 ; R39.2@505,895.59 R39.2@500,900.59
NetR40_2: R40.2 U3.4 | length 102
  Top Layer w10: R40.2 585,990.48 U3.4
NetR53_2: R53.2 U11.1 | length 94.4
  Top Layer w20: R53.2 U11.1
NetR57_2: R57.2 U13.4 | length 88.6
  Bottom Layer w10: U13.4 2095,1365.58 R57.2
NetR58_2: R58.2 U13.5 | length 79.4
  Bottom Layer w10: R58.2@2045,1360.59 U13.5
NetR59_2: R59.2 U2.10 | length 102.3
  Top Layer w10: U2.10 700.58,415 R59.2
NetR60_2: R60.2 U2.9 | length 86.6
  Top Layer w10: U2.9 719.41,365 R60.2
NetR63_2: R63.2 U10.2 | length 93.1
  Bottom Layer w10: U10.2 R63.2
NetR64_2: R64.2 U10.3 | length 93.1
  Bottom Layer w10: U10.3 R64.2
NetRS1_2: RS1.2 U9.2 U9.3
OV_VSYNC: U1.100
PA0: R31.1 U1.34 | length 444.3
  Top Layer w10: v1(1950,1075) 1950,1004.92 U1.34
  Bottom Layer w10: R31.1 1774.41,824.41 1830,880 1830,1000 1905,1075 v1(1950,1075)
PA1: U1.35
PA2: LED3.2 R59.1 U1.36 串口2.1 | length 3789.5
  Top Layer w10: 串口2.1 140,1215 165,1190 165,838.17 76.83,750 76.83,325 101.83,300 v1(535,300) ; R59.1 814.41,505.59 825,495 v1(825,445) v1(825,300) 825,220 LED3.2 ; U1.36 1994.29,1000 v1(2015,1000)
  Bottom Layer w10: v1(535,300) v1(825,300) ; v1(825,445) 1060,445 1290,675 1990,675 2015,700 v1(2015,1000)
PA3: LED2.2 R60.1 U1.37 串口2.2 | length 3548.9
  Top Layer w10: 串口2.2 100,1115 145,1070 145,840.79 55,750.79 55,320 95,280 v1(510,280) ; LED2.2@785.59,245.59 R60.1 ; v1(2070,1045) 2070.2,1045.2 U1.37
  Bottom Layer w10: v1(510,280) v1(785,280) ; v1(785,325) 970,325 1304,659 1996.63,659 2031,693.37 2031,981 2070,1020 v1(2070,1045)
PA5: U1.41
PA6: U1.42
PA7: U1.43
PA9: R47.2 U1.101 | length 1118.2
  Top Layer w10: R47.2 620,1880 715.13,1975.13 780,1975.13 915.13,1840 v1(1020,1840) ; v1(1435,1930) 1438.31,1926.69 U1.101
  Bottom Layer w10: v1(1020,1840) 1140,1840 1216.13,1916.13 1377.82,1916.13 1391.69,1930 v1(1435,1930)
PA10: R43.2 U1.102 | length 1178.7
  Top Layer w10: R43.2 641.13,2085 735,1991.13 903.87,1991.13 v1(1000,1895) ; v1(1000,1810) 1030,1810 1049.46,1829.46 1125.54,1829.46 v1(1135,1820) ; v1(1415,1910) 1418.62,1906.38 U1.102
  Bottom Layer w10: v1(1000,1810) v1(1000,1895) ; v1(1135,1820) 1145,1820 1225,1900 1405,1900 v1(1415,1910)
PA11: R24.1 U1.103 | length 862.3
  Top Layer w10: R24.1 699.4,1730 v1(1040,1730) ; U1.103 1398.94,1731.06 v1(1400,1730)
  Bottom Layer w10: v1(1040,1730) 1039.46,1730.54 1399.46,1730.54 v1(1400,1730)
PA12: R25.1 U1.104 | length 721.6
  Top Layer w10: R25.1 v1(995,1600) ; v1(1290,1600) 1379.25,1689.25 U1.104
  Bottom Layer w10: v1(995,1600) v1(1290,1600)
PA13: SWD.1 U1.105 | length 329.2
  Top Layer w10: SWD.1@1105,1875 1146.13,1916.13 1353.87,1916.13 1359.57,1910.43 U1.105
PA14: SWD.2 U1.109 | length 114.3
  Top Layer w10: SWD.2@1105.51,1774.49 U1.109
PB1: R21.1 U1.47 | length 791
  Top Layer w10: U1.47 2157.36,1282.36 2200,1325 2200,1925 2190,1935 R21.1
PB8: U1.139
PB9: U1.140
PB12: U1.73
PB13: U1.74
PB14: U1.75
PB15: U1.76
PC0: U1.26
PC1: U1.27
PC2: U1.28
PC3: U1.29
PC4: U1.44
PC5: R19.1 U1.45 | length 1008.5
  Top Layer w10: U1.45 2167.94,1242.99 2240,1315.05 2240,2030 2205,2065 R19.1
PC6: U1.96
PC7: U1.97
PC8: U1.98
PC9: U1.99
PC10: R57.1 U1.111 串口4.1 | length 2967.5
  Top Layer w10: v1(1125,1625) 1130,1625 1149.46,1644.46 1149.46,1715 1169.58,1735.12 U1.111 1275.12,1735.12 v1(1295,1755) ; v1(1470,1675) v1(1470,1755)
  Bottom Layer w10: 串口4.1 180,1950 215,1915 215,1655 351,1519 913,1519 924.5,1530.5 924.5,1584.5 958.87,1618.87 1118.87,1618.87 v1(1125,1625) ; v1(1295,1755) v1(1470,1755) ; v1(1470,1675) 1472.5,1677.5 1642.5,1677.5 1660,1660 1660,1347.37 1703.37,1304 1976,1304 2000,1280 2001.59,1280 ; 2001.59,1278.41 2098.41,1278.41 2105,1285 R57.1
PC11: R58.1 U1.112 串口4.2 | length 2712.8
  Top Layer w10: v1(1065,1580) 1115,1580 1165.46,1630.46 1165.46,1708.37 1172.52,1715.43 U1.112 v1@1284.57,1715.43
  Bottom Layer w10: 串口4.2 175,1850 185,1840 185,1650 340,1495 912.13,1495 940.5,1523.37 940.5,1550.5 970,1580 v1(1065,1580) ; v1(1290,1710) 1291.13,1711.13 1640,1711.13 1680,1671.13 1680,1350 1710,1320 1985,1320 2000.59,1304.41 R58.1
PC12: U1.113
PC13: R33.1 U1.7 | length 238.4
  Top Layer w10: U1.7 1418.62,966.38 1455,930 v1(1455,835)
  Bottom Layer w10: R33.1 1455,810.6 v1(1455,835)
PD0: U1.114
PD1: U1.115
PD2: U1.116
PD3: U1.117
PD4: U1.118
PD5: U1.119
PD6: R54.2 U1.122 U11.4 | length 1422.8
  Top Layer w10: U1.122 1403.58,1518.58 v1(1405,1520) ; v1(2235,1255) U11.4 2355,1349.41 R54.2
  Bottom Layer w10: v1(1405,1520) 1595,1520 1644,1471 1644,1331 1687,1288 1960,1288 1990.5,1257.5 2232.5,1257.5 v1(2235,1255)
PD7: U1.123
PD8: U1.77
PD9: U1.78
PD10: U1.79
PD11: U1.80
PD12: U1.81
PD13: U1.82
PD14: U1.85
PD15: U1.86
PE0: R35.1 R37.1 U1.141 | length 1310.9
  Top Layer w10: v1@215,755 v1(220,760) R35.1 R37.1 ; v1(1150,1145) 1150.43,1144.57 U1.141
  Bottom Layer w10: v1(220,760) 535,760 685,910 900,910 1135,1145 v1(1150,1145)
PE1: R36.1 R38.1 U1.142 | length 1164.8
  Top Layer w10: R36.1 R38.1 385,829.4 v1(385,740) ; v1(1160,1120) 1165,1120 1169.88,1124.88 U1.142
  Bottom Layer w10: v1(385,740) 540,740 694,894 934,894 v1(1160,1120)
PE2: U1.1
PE3: U1.2
PE4: U1.3
PE5: U1.4
PE6: U1.5
PE7: U1.58
PE8: U1.59
PE9: U1.60
PE10: U1.63
PE11: U1.64
PE12: U1.65
PE13: U1.66
PE14: U1.67
PE15: U1.68
PF0: U1.10
PF1: U1.11
PF2: U1.12
PF3: U1.13
PF4: U1.14
PF5: U1.15
PF6: U1.18
PF7: U1.19
PF8: U1.20
PF9: U1.21
PF10: U1.22
PF11: U1.49
PF12: U1.50
PF13: U1.53
PF14: U1.54
PF15: U1.55
PG0: U1.56
PG1: U1.57
PG2: U1.87
PG3: U1.88
PG4: U1.89
PG5: U1.90
PG6: U1.91
PG7: U1.92
PG8: U1.93
PG9: U1.124
PG10: U1.125
PG11: U1.126
PG12: U1.127
PG13: U1.128
PG14: U1.129
PG15: U1.132
R2IN: R63.1 U2.8 | length 380.7
  Top Layer w10: v1(340,365) U2.8
  Bottom Layer w10: R63.1 315,590 340,565 v1(340,365)
RESET: C21.2 R10.1 RESET.1 U1.25 | length 869.4
  Top Layer w10: RESET.1@1270,717.09 v1(1270,770) ; v1(1775,890) U1.25@1775,1002.75
  Bottom Layer w10: C21.2 R10.1 1269.41,769.41 v1(1270,770) 1325,770 1445,890 v1(1775,890)
RIIN: U2.13
RXD_3403.3: Q4.2 R47.1 R48.1 R49.2 | length 200.2
  Top Layer w10: R49.2 R47.1 474.41,1842.44 Q4.2 456.18,1810.59 R48.1
RXD_3405: Q4.3 R49.1 R50.1 U4.3 | length 537.1
  Top Layer w10: R50.1 Q4.3 ; Q4.3@359.41,1791.22 R49.1 359.41,1899.41 380,1920 585,1920 v1(625,1960)
  Bottom Layer w10: v1(625,1960) U4.3
SCK2: R16.1 R17.2 U6.4 | length 330.6
  Top Layer w10: U6.4 596.61,1111.61 635,1150 R16.1 ; R16.1@635.6,1220 R17.2
SCL_345: R24.2 R27.1 U5.14 | length 133.6
  Top Layer w10: R27.1 611.18,1654.41 R24.2 U5.14
SDA_345: R25.2 R28.1 U5.13 | length 149.8
  Top Layer w10: U5.13 748.74,1573.74 775,1600 R25.2 R28.1
SDI: R15.1 R18.2 U6.3 | length 330.9
  Top Layer w10: U6.3 537.21,1137.21 v1(550,1150) 570,1170 R15.1 ; v1(665,1150) 694.41,1150 R18.2
  Bottom Layer w10: v1(550,1150) v1(665,1150)
SDO: R13.2 TP1.1 U6.5 | length 611.2
  Top Layer w10: R13.2 374.85,1090 ; U6.5 374.85,1090 ; 825,1090 374.85,1090 ; 825,1095 840,1110 TP1.1
SDO_345: R29.2 U5.12 | length 76.7
  Top Layer w10: U5.12 R29.2@807.18,1542.24
T1OUT: U2.14
T2OUT: R64.1 U2.7 | length 234
  Top Layer w10: v1(300,415) U2.7
  Bottom Layer w10: R64.1 265.59,434.41 285,415 v1(300,415)
TXD_3403.3: Q3.2 R43.1 R44.1 R46.2 | length 186.9
  Top Layer w10: R46.2 R43.1 454.41,2032.44 Q3.2 503.19,2027.4 R44.1
TXD_3405: Q3.3 R45.1 R46.1 U4.2 | length 820.2
  Top Layer w10: R45.1 Q3.3 370.63,2014.37 339.41,2045.59 R46.1 339.41,2119.41 370,2150 715,2150 765,2100 v1(765,2015)
  Bottom Layer w10: U4.2 703.19,2015 v1(765,2015)
VCC3.3: C3.2 C4.2 C5.2 C8.1 C9.1 C10.1 C11.1 C12.1 C13.1 C14.1 C15.1 C16.1 C17.1 C18.1 C19.2 C20.2 C24.2 C25.2 C26.1 C27.1 C32.1 C33.1 LD1.1 LD2.1 LD3.1 Q3.1 Q4.1 R7.2 R10.2 R14.2 R15.2 R16.2 R26.2 R27.2 R28.2 R30.2 R44.2 R48.2 R54.1 R61.1 R62.1 SW1.3 SW2.3 TVS1.2 U1.6 U1.17 U1.32 U1.33 U1.39 U1.52 U1.62 U1.72 U1.84 U1.95 U1.108 U1.121 U1.131 U1.144 U2.16 U3.2 U5.1 U6.6 U6.8 U8.2 U13.11 | length 12266.2
  Top Layer w10: C16.1 1121.1,1085.51 U1.144 1396.64,1085.51 1398.94,1087.81 U1.6 1398.94,928.08 cw(c1387.52,928.08) C18.1 ; C3.2@1137.31,1538.27 U1.121 ; C15.1@1139.18,1341.42 U1.131 1298.58,1341.42 1325,1315 1325,1088.69 ; C4.2 1280.12,1875.59 U1.108 1300.51,1790.51 v1(1300,1790) ; 1388.74,1088.69 1388.93,1088.87 1905,1088.87 1928.87,1065 1930.43,1065 U1.33 ; v1(1555,1775) 1556.42,1776.42 U1.95 1556.42,1926.42 1575,1945 C5.2 ; C17.1 ccw(c1611.84,922.56) 1615.47,922.56 U1.17 1615.47,1088.4 ; v1@1772.95,1767.05 U1.84 C13.1@1772.95,1947.35 ; C11.1 1910.75,950 U1.32 U1.33 ; C12.1@1930.43,920 U1.33 ; v1(1975,1575) 1977.64,1577.64 U1.62 C10.1@2152.05,1577.64 ; v1(1985,1355) 1990,1355 2015.79,1380.79 U1.52 2070.99,1380 v1(2145,1380) 2155,1390 C10.1 ; v1(2005,1125) 2005.12,1124.88 U1.39 C8.1@2159.29,1124.88 ; v1(2015,1775) 2015.51,1774.49 U1.72 ; C8.1 2159.41,1209.41 2245,1295 2280,1295 2304.41,1319.41 R54.1 2305,1350.59 v1(2305,1380)
  Top Layer w20: U6.6 372.79,1137.21 366.61,1143.39 366.61,1188.39 ; U6.8 366.61,1188.39 ; Q4.1 493.18,1742.6 R48.2 559.41,1710 R27.2 559.41,1590.59 576.26,1573.74 U5.1 ; Q3.1 493.18,1952.6 R44.2 589.41,1969.41 v1(590,1970) ; v1(495,1605) 494.41,1604.41 R26.2 ; v1@589.41,75 R7.2 R61.1 589.41,679.41 U2.16@625,715 ; R30.2 619.41,1286.18 R16.2 ; U2.16 C33.1@734.4,715 ; v1(705,1275) 639.42,1275 R16.2 ; C33.1 739.41,764.41 v1@790,815 ; v1(790,820) U3.2 ; R28.2 1010,1660 1025,1645 1025,1465 1050,1440 1130.59,1440 1135.59,1435 ; C15.1 1135.59,1435 ; C3.2 1135.59,1435 ; v1(1395,795) v1(1395,875) 1395,919.41 C18.1 ; SW2.3 1692.91,755 v1(1720,755) ; C13.1 1789.41,1935 LD3.1 LD2.1 LD1.1 ; C12.1@1930.43,920 1930.43,869.57 1958.86,841.14 SW1.3 ; 366.61,1188.39 353.82,1201.18 C20.2 C19.2 265,1330 355,1420 R26.2 ; R26.2 494.41,1335.59 510,1320 R14.2 R15.2 R16.2
  Bottom Layer w10: v1(1300,1790) 1316.13,1773.87 1555,1773.87 1564.87,1764 1670.77,1764 1671.77,1765 v1(1775,1765) 1790,1765 1840,1815 1960,1815 1975.6,1799.4 C14.1 v1(2015,1775) ; v1(1885,1090) 1920,1125 v1(2005,1125) ; C9.1 v1(1985,1355) ; v1(2145,1380) v1(2305,1380)
  Bottom Layer w20: TVS1.2@418.93,108.42 C24.2 C25.2 694.2,108.42 U8.2 666.4,75 v1(590,75) ; v1(495,1385) 500,1390 v1(1135,1390) ; v1(495,1605) v1(559.41,1605) ; v1(560,1710) 590,1740 v1(590,1970) ; v1(705,1275) 775,1275 790,1260 U3.2 ; v1(790,820) 789.41,820.59 R10.2 1185,855 1205,875 v1(1395,875) ; v1(1395,795) 1395,750 1415,730 C27.1 1434.41,728.56 1463.96,699 1749,699 1774.41,724.41 C26.1 1759.41,755 v1(1720,755) ; C32.1 1744.41,1439.41 U13.11 1745,1465 1810,1530 1930,1530 v1(1975,1575) 1975,1774.4 C14.1
VIN: 12IN1.1 SW3.3
VIN1: CAN.1 CIN1.1 CIN2.1 CIN3.2 DR1.1 RS1.1 SW3.2 U9.4 | length 2119.9
  Top Layer w30: v1(1660,1790) 1660,1770 v1(1700,1730) ; v1(1750,1520) 1750,1335 2009.83,1075.17 2009.83,1059 2050.73,1018.1 2050.73,759.27 2060,750
  Bottom Layer w30: v1(1660,1790) 1660,2060 1725,2125 2150,2125 CAN.1 ; v1(1700,1730) 1750,1680 v1(1750,1520)
VIN2: CAN.2 R53.1 | length 1330.7
  Top Layer w15: CAN.2 2258.5,2096.5 2258.5,1321.5 v1(2260,1320) ; R53.1 2210,955.59 v1(2210,1000)
  Bottom Layer w15: v1(2210,1000) 2210,1010 2260,1060 v1(2260,1320)
VUSB: C31.2 R45.2 R50.2 R51.1 U4.16 USB.A4B9 USB.A9B4 | length 1689
  Top Layer w20: R50.2 R45.2 ; v1@1245.53,2020 USB.A9B4 ; USB.A4B9 1434.49,2020.51 v1(1435,2020)
  Bottom Layer w20: v1(255,1920) 340,1920 350.59,1930.59 R51.1 C31.2 U4.16 500,2060 545,2105 895,2105 980,2020 v1(1245,2020) v1(1435,2020)
pads on no net: RESET.2 RESET.4 SW1.2 SW1.4 SW2.2 SW2.4 SW3.1 SW3.4 SW3.5 SW3.6 U1.106 U2.11 U2.12 U3.3 U3.8 U3.9 U3.10 U4.9 U4.10 U4.11 U4.12 U4.13 U4.14 U4.15 U5.3 U5.10 U5.11 U9.8 U10.8 U13.3 U13.6 U13.7 U13.8 U13.9 U13.10 U13.12 U13.13 U13.14 U13.15 U13.16 U13.17 U13.18 U13.19 U13.20 U13.21 U13.22 USB.A8 USB.B8

## Polygon pours and split planes (outlines as drawn)
GND on Top Layer "Bottom Layer-No Net" (solid, pour order 8): 0,0 0,2362.2 2550,2362.2 ccw(c2562.07,2350.13) 2545,2350.13 2545,2050 2280,2050 2280,1420 2550,1420 2550,940 2464.29,854.29 cw(c2393.58,925) 2393.58,825 2220,825 2029.14,825 ccw(c2029.14,790.86) 2005,815 1989.29,799.29 ccw(c2060,728.58) 1960,728.58 1960,680 1960,663.28 cw(c1891.72,663.28) 1940,615 1370,615 1339.29,645.71 ccw(c1268.58,575) 1268.58,675 1240,675 1111.42,675 ccw(c1111.42,575) 1040.71,645.71 985,590 ccw(c1021.21,553.79) 970,553.79 970,345 970,12.07 cw(c952.93,12.07) 965,0 0,0
GND on Bottom Layer "Bottom Layer-No Net" (solid, pour order 10): 0,0 0,2362.2 2550,2362.2 2550,29.14 ccw(c2584.14,29.14) 2560,5

## Keep-outs
Keep-Out Layer:
  lines w10: 2545,2050 2280,2050 2280,1420 2550,1420 ; 0,0 2550,0 2550,2362.2 0,2362.2 0,0

## Other copper
Top Layer:
  rectangle net GND: 2105,375 2405,445
  rectangle net NetR2_2: 1500,240 1595,385
  region net GND: 1372.93,435 cw(c1372.93,417.93) 1385,430 1385,410 cw(c1360.86,434.14) 1360.86,400 1300,400 ccw(c1324.14,375.86) 1290,375.86 1280,325 1285,275 1290,275 cw(c1277.93,287.07) 1277.93,270 1170,270 1175,315 1170,358.58 cw(c1270,358.58) 1199.29,429.29 1205,435
  region net GND: 1715,325 1740,300 1763.79,300 cw(c1763.79,248.79) 1800,285 cw(c1787.93,272.93) 1805,272.93 1805,175 ccw(c1817.07,175) 1808.54,166.46 1810,165 ccw(c1834.14,189.14) 1834.14,155 2105,155 2135.71,185.71 ccw(c2065,256.42) 2165,256.42 2165,368.58 ccw(c2065,368.58) 2135.71,439.29 2135,440 ccw(c2122.93,427.93) 2122.93,445 1980,445 cw(c1980,517.43) 1928.79,466.21 1920,475 ccw(c1907.93,462.93) 1907.93,480 1710,480 1710,472.07 ccw(c1727.07,472.07) 1715,460
  region net GND: 1170,55 ccw(c1170,52.61) 1167.61,52.61 1167.61,42.39 ccw(c1170,42.39) 1170,40 1191.4,37.35 1200.68,40 cw(c1200.68,35.54) 1205.14,35.54
  region net VIN1: 1975,585 1975,655 cw(c1999.14,655) 1982.07,672.07 1995,685 ccw(c1970.86,709.14) 2005,709.14 2005,775 cw(c2025,775) 2025,795 2200,795 cw(c2200,785) 2210,785 2210,655 cw(c2200,655) 2200,645 cw(c2185,645) 2185,630 2160,630 cw(c2160,645) 2145,645 2145,710 ccw(c2140,710) 2140,715 2085,715 ccw(c2085,685) 2055,685 2060,670 2060.61,660.61 ccw(c2075.61,660.61) 2075.61,645.61 2070,645 cw(c2070,639.79) 2075.21,639.79 2075.21,560
  region net VIN: 2220,620 2220,654.64 cw(c2305.36,654.64) 2245,715 cw(c2249.53,710.47) 2249.53,716.88 2343.87,716.88 cw(c2343.87,683.87) 2367.21,707.21 cw(c2359.33,699.33) 2370.47,699.33 2370.47,530 2227.07,530 ccw(c2227.07,512.93) 2215,525
  region net GND: 1167.93,51.41 ccw(c1205.14,88.61) 1205.14,35.99 2500,35 2523.61,58.61 ccw(c2513.71,68.52) 2527.72,68.52 1850,75
  region net GND: 1180,280 ccw(c1180,270) 1170,270 1170,45 cw(c1175,45) 1175,50 2500,50 ccw(c2500,80) 2530,80 2530,540 ccw(c2510,540) 2510,560 2425,560 ccw(c2425,525) 2390,525 2390,465 cw(c2360,465) 2360,435 2235,435 ccw(c2235,335) 2135,335 2135,215 2134.29,214.29 cw(c2063.58,285) 2063.58,185 1511.21,185 cw(c1511.21,236.21) 1475,200 1475,295 1218.28,295 ccw(c1218.28,226.72) 1170,275
  region net NetRS1_2: 1510,480 1510,405 ccw(c1515,405) 1515,400 1594.39,399.39 cw(c1594.39,384.39) 1609.39,384.39 1610,375 ccw(c1615,375) 1615,370 1675,370 ccw(c1675,385) 1690,385 1690,435 1622.07,437.07 cw(c1622.07,447.07) 1612.07,447.07 1611.72,446.72 ccw(c1571.72,446.72) 1571.72,486.72 1515,485
  region net NetL1_1: 1394.59,400 1394.59,345.41 ccw(c1410,345.41) 1410,330 1471.46,328.54 ccw(c1471.46,333.54) 1476.46,333.54 1475,335 ccw(c1475,345) 1485,345 1485,400
  region net NetL1_1: 1200,570 1200,488.24 ccw(c1238.05,488.24) 1238.05,450.19
  region net NetL1_1: 1200,490 ccw(c1230,490) 1230,460 ccw(c1240,460) 1240,450 1385,450 cw(c1385,440) 1395,440 1395,400 ccw(c1400,400) 1400,395 ccw(c1420,395) 1420,375 1460,375 ccw(c1460,400) 1485,400 1485,490 ccw(c1390,490) 1390,585 1210,585 ccw(c1210,575) 1200,575
  region net VIN: 2150,540 ccw(c2215,540) 2215,475 2315,475 ccw(c2315,530) 2370,530 2370,700 ccw(c2360,700) 2360,710 2313.54,716.46 ccw(c2313.54,711.46) 2308.54,711.46 2305,710 2310,705 ccw(c2310,695) 2300,695 2300,630 cw(c2290,630) 2290,620 2190,620 ccw(c2190,580) 2150,580
  region net VIN1: 1495,575 1495,542.07 cw(c1477.93,542.07) 1490,530 ccw(c1520,530) 1520,500 1595,500 cw(c1595,495) 1600,495 ccw(c1615,495) 1615,480 1680,480 ccw(c1680,495) 1695,495 2045,495 ccw(c2045,525) 2075,525 2075,595 ccw(c2070,595) 2070,600 cw(c2060,600) 2060,590 1510,590 ccw(c1510,575)
  region net 5V: 1115,600 1122.93,592.07 cw(c1105.86,575) 1130,575 1130,306.21 cw(c1078.79,306.21) 1115,270 cw(c1102.93,257.93) 1120,257.93 1120,122.07 ccw(c1137.07,122.07) 1125,110 1132.93,102.07 ccw(c1150,119.14) 1150,95 1150,40 cw(c1137.93,52.07) 1137.93,35 1056.42,35 cw(c1056.42,135) 985.71,64.29 980,70 980,330 1015,365 ccw(c966.72,413.28) 1035,413.28 1035,587.93 cw(c1052.07,587.93) 1040,600

## Text inside footprints (layer, text, board x,y; h text height)
U3: Top Overlay "MD0" at 350,965 h30 r90; Top Overlay "MD1" at 450,970 h30 r90; Top Overlay "RXD" at 550,965 h30 r90; Top Overlay "TXD" at 650,965 h30 r90; Top Overlay "AUX" at 750,965 h30 r90; Top Overlay "VCC" at 850,970 h30 r90; Top Overlay "GND" at 975,970 h30 r91
U10: Top Overlay "232" at 100,785 h60 r90; Top Overlay "CAN" at 750,855 h60